# EAGLE board juki_shield (EAGLE 5.11)
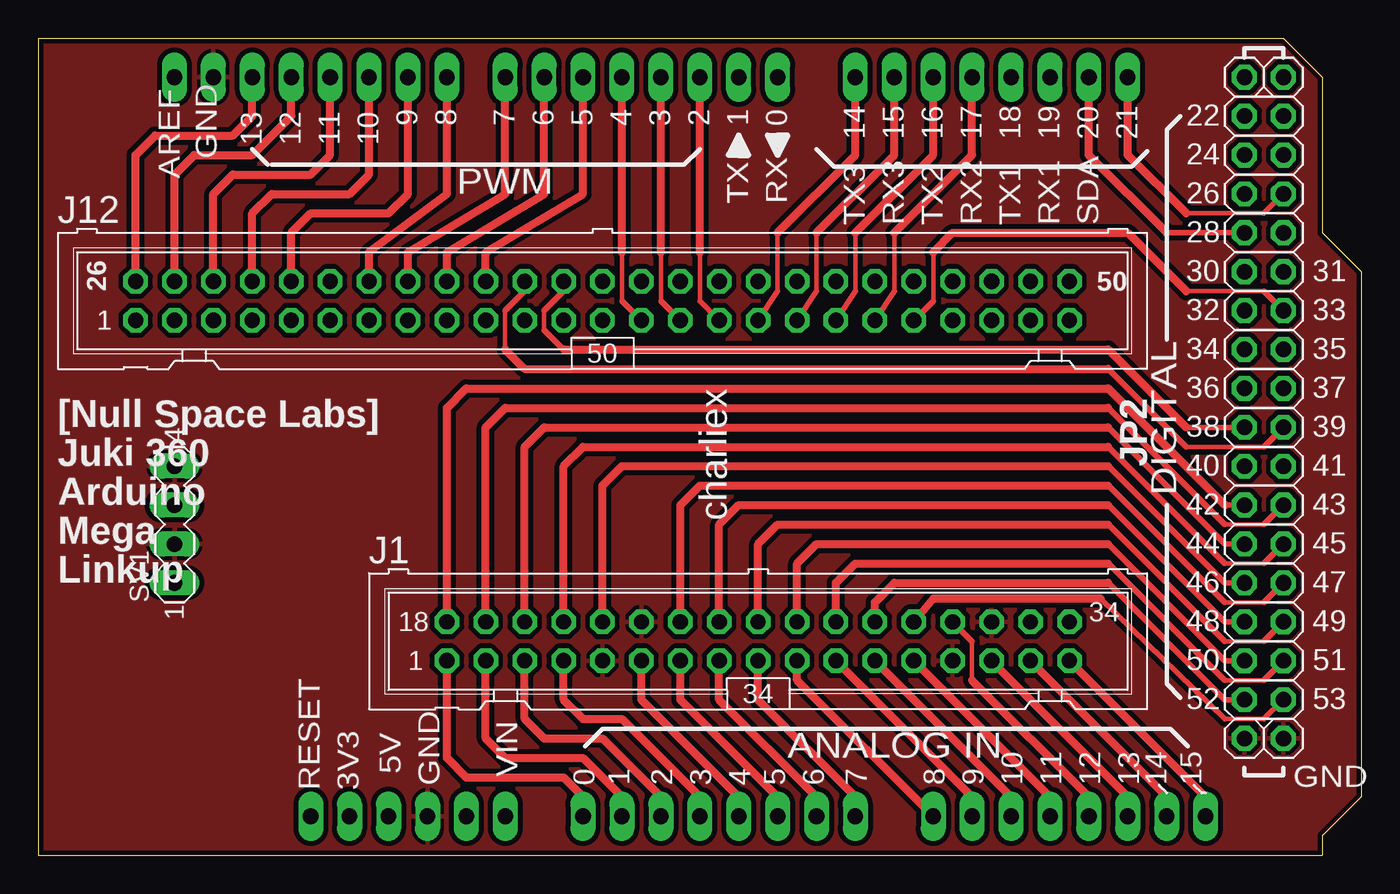
[diagram p0: board, top side]
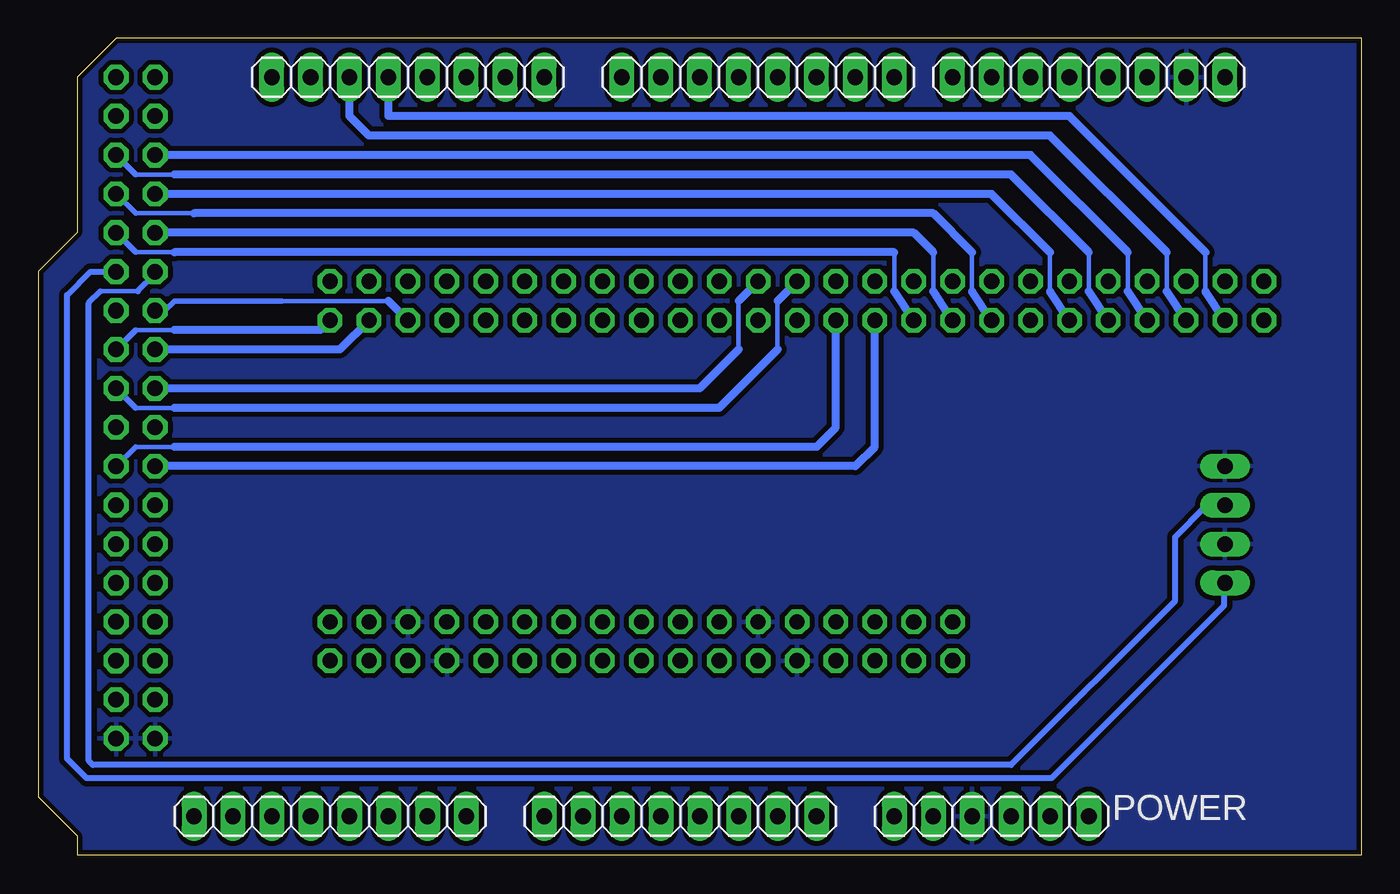
[diagram p1: board, bottom side, seen from below]

Size 86.36 x 53.34 mm. Coordinates in mm from the lower left corner, seen from the top.
Outline: 0,53.34 81.28,53.34 83.82,50.8 83.82,40.64 86.36,38.1 86.36,3.81 83.82,1.27 83.82,0 0,0 0,53.34
Copper layers (1*16): Top 0.0356mm / dielectric 1.5011mm / Bottom 0.0356mm
Design rules "SparkFun-mod": minimum track width 8mil, minimum drill 20mil, track to track 12mil, track to pad 12mil, pad to pad 8mil, via to via 8mil, smd to smd 8mil, copper to edge 12mil, drill to drill 8mil, minimum pad ring 12mil, minimum via ring 10mil, stop-mask expansion 4mil, vias tented up to drill 25mil, thermal gap 10mil
Net classes: 0 default: width 0.356 mm, drill 0.406 mm, clearance 0.203 mm; 1 power: width 0.61 mm, drill 0.711 mm, clearance 0.203 mm; 2 gnd: width 0.305 mm, drill 0.711 mm, clearance 0.203 mm; 3 usbvcc: width 0.508 mm, drill 0.711 mm, clearance 0.203 mm
Milling: 9 lines

## Footprints (pad centres in the part's own frame; a part is rotated, then mirrored left to right if it is on the bottom)
1X08 = drill 1.016 long: 1 -8.89,0; 2 -6.35,0; 3 -3.81,0; 4 -1.27,0; 5 1.27,0; 6 3.81,0; 7 6.35,0; 8 8.89,0
ML34 = drill 0.991 octagon: 1 -20.32,-1.27; 2 -17.78,-1.27; 3 -15.24,-1.27; 4 -12.7,-1.27; 5 -10.16,-1.27; 6 -7.62,-1.27; 7 -5.08,-1.27; 8 -2.54,-1.27; 9 0,-1.27; 10 2.54,-1.27; 11 5.08,-1.27; 12 7.62,-1.27; 13 10.16,-1.27; 14 12.7,-1.27; 15 15.24,-1.27; 16 17.78,-1.27; 17 20.32,-1.27; 18 -20.32,1.27; 19 -17.78,1.27; 20 -15.24,1.27; 21 -12.7,1.27; 22 -10.16,1.27; 23 -7.62,1.27; 24 -5.08,1.27; 25 -2.54,1.27; 26 0,1.27; 27 2.54,1.27; 28 5.08,1.27; 29 7.62,1.27; 30 10.16,1.27; 31 12.7,1.27; 32 15.24,1.27; 33 17.78,1.27; 34 20.32,1.27
ML50 = drill 0.991 octagon: 1 -30.48,-1.27; 2 -27.94,-1.27; 3 -25.4,-1.27; 4 -22.86,-1.27; 5 -20.32,-1.27; 6 -17.78,-1.27; 7 -15.24,-1.27; 8 -12.7,-1.27; 9 -10.16,-1.27; 10 -7.62,-1.27; 11 -5.08,-1.27; 12 -2.54,-1.27; 13 0,-1.27; 14 2.54,-1.27; 15 5.08,-1.27; 16 7.62,-1.27; 17 10.16,-1.27; 18 12.7,-1.27; 19 15.24,-1.27; 20 17.78,-1.27; 21 20.32,-1.27; 22 22.86,-1.27; 23 25.4,-1.27; 24 27.94,-1.27; 25 30.48,-1.27; 26 -30.48,1.27; 27 -27.94,1.27; 28 -25.4,1.27; 29 -22.86,1.27; 30 -20.32,1.27; 31 -17.78,1.27; 32 -15.24,1.27; 33 -12.7,1.27; 34 -10.16,1.27; 35 -7.62,1.27; 36 -5.08,1.27; 37 -2.54,1.27; 38 0,1.27; 39 2.54,1.27; 40 5.08,1.27; 41 7.62,1.27; 42 10.16,1.27; 43 12.7,1.27; 44 15.24,1.27; 45 17.78,1.27; 46 20.32,1.27; 47 22.86,1.27; 48 25.4,1.27; 49 27.94,1.27; 50 30.48,1.27
2X08 = drill 1.016 octagon: 1 -8.89,-1.27; 2 -8.89,1.27; 3 -6.35,-1.27; 4 -6.35,1.27; 5 -3.81,-1.27; 6 -3.81,1.27; 7 -1.27,-1.27; 8 -1.27,1.27; 9 1.27,-1.27; 10 1.27,1.27; 11 3.81,-1.27; 12 3.81,1.27; 13 6.35,-1.27; 14 6.35,1.27; 15 8.89,-1.27; 16 8.89,1.27
1X01 = drill 1.016 octagon: 1 0,0
1X06 = drill 1.016 long: 1 -6.35,0; 2 -3.81,0; 3 -1.27,0; 4 1.27,0; 5 3.81,0; 6 6.35,0
MA04-1 = drill 1.016 long: 1 -3.81,0; 2 -1.27,0; 3 1.27,0; 4 3.81,0

## Placement (x,y rotation side)
ADCH  8-15  [1X08]  67.31,2.54 180 bottom
ADCL  0-7  [1X08]  44.45,2.54 180 bottom
COMMUNICATION  [1X08]  62.23,50.8 0 bottom
J1  [ML34]  46.99,13.97 0 top
J12  [ML50]  36.83,36.2 0 top
JP1  22-37  [2X08]  80.01,39.37 90 top
JP2  38-53  [2X08]  80.01,19.05 90 top
JP3  +5V  [1X01]  78.74,50.8 0 top
JP4  +5V  [1X01]  81.28,50.8 0 top
JP5  GND  [1X01]  78.74,7.62 0 top
JP6  GND  [1X01]  81.28,7.62 0 top
POWER  Reset 3v3 5V GND Vin  [1X06]  24.13,2.54 180 bottom
PWMH  8-13 GND AREF  [1X08]  17.78,50.8 0 bottom
PWML  RX(0) TX(1) 2-7  [1X08]  39.37,50.8 0 bottom
SV1  [MA04-1]  8.89,21.59 90 top

## Library data of the parts
ADCH ADCL COMMUNICATION JP1-JP6 POWER PWMH PWML = pinhead
J1 J12 = con-ml; OC_FARNELL: unknown; OC_NEWARK: unknown
SV1 = con-lstb; OC_FARNELL: unknown; OC_NEWARK: unknown

## Nets
90O: J12.38 JP1.1
+X: J12.14 PWML.5
+Y: J12.16 PWML.3
-X: J12.15 PWML.4
-Y: COMMUNICATION.8 J12.17
ACENT: ADCH.6 J1.15
AREF: PWMH.8
CCWSW: J12.25 JP1.3
CENTERING: J1.18 JP2.12
CVY-M: J1.26 JP2.5
CW/CCW: ADCL.6 J1.7
CWSW: J12.26 PWMH.6
DISPENSEREND: J12.30 PWMH.2
DISPENSERSTART: J1.27 JP2.4
FAST: COMMUNICATION.7 J12.18
GND: J1.5 J1.14 J1.23 J1.32 JP5.1 JP6.1 POWER.4 PWMH.7 SV1.2 SV1.4
HEAD: J1.20 JP2.10
HEADDN: J12.39 JP1.2
LOCATOR: J1.24 JP2.7
M.ORG: J12.28 PWMH.4
MCENT: J12.27 PWMH.5
N$2: JP1.16
N$3: JP1.15
N$33: J1.33
N$34: J1.34
N$51: POWER.1
N$52: POWER.2
N$53: POWER.3
N$55: POWER.5
N$56: POWER.6
N$81: JP3.1
N$82: JP4.1
N$115: J12.1
N$121: J12.7
N$127: J12.13
N$136: J12.22
N$145: J12.31
N$154: J12.40
N$155: J12.41
N$156: J12.42
N$157: J12.43
N$158: J12.44
N$159: J12.45
N$160: J12.46
N$161: J12.47
N$162: J12.48
N$163: J12.49
N$164: J12.50
PCBDETECTOR: J12.36 JP2.15
PCBIN: J12.35 PWML.6
PCBOUT: J12.34 PWML.7
PINUP: J12.33 PWML.8
PULSE: ADCL.5 J1.6
READYIN: J12.32 PWMH.1
READYOUT: ADCL.7 J1.8
ROT: J1.19 JP2.11
ROT_L: JP1.8 SV1.3
ROT_R: JP1.7 SV1.1
RX: PWML.1
SPARE1: ADCL.8 J1.9
SPARE2: ADCH.1 J1.10
SPARE3: ADCH.2 J1.11
SPARE4: ADCH.3 J1.12
SPARE5: ADCH.4 J1.13
SPARE6: ADCH.7 J1.16
SPARE7: J1.30 JP2.1
SPARE8: ADCH.5 J1.31
SPAREA: J12.23 JP1.6
SPAREB: J12.24 JP1.4
SPAREC: J12.29 PWMH.3
SPOT: J1.29 JP2.2
STOPPER: J1.25 JP2.6
SUPPORTER: J1.22 JP2.8
T-HEAD: J12.21 JP1.5
T-VAC: COMMUNICATION.5 J12.20
TACSENSE: J12.37 JP2.16
TAPEKNOCK: ADCH.8 J1.17
TEACH: COMMUNICATION.6 J12.19
TX: PWML.2
VAC: J1.21 JP2.9
VCHANGE: J1.28 JP2.3
XCCW: ADCL.2 J1.2
XCW: ADCL.1 J1.1
XHM: J12.6 JP1.12
XL1: COMMUNICATION.4 J12.2
XL2: COMMUNICATION.3 J12.3
XL3: J12.4 JP1.14
XL4: J12.5 JP1.13
YCCW: ADCL.4 J1.4
YCW: ADCL.3 J1.3
YHM: J12.12 JP2.13
YL1: COMMUNICATION.1 J12.8 JP1.11
YL2: COMMUNICATION.2 J12.9 JP1.10
YL3: J12.10 JP1.9
YL4: J12.11 JP2.14

## Tracks (layer width: path | path; a pad name or v marks a point on that pad's centre or on a via)
90O
  Bottom 0.305: 77.47,29.21 80.01,29.21 | 38.1,33.02 38.1,36.2
  Bottom 0.356: 80.01,29.21 JP1.1
  Bottom 0.508: 77.47,29.21 41.91,29.21 38.1,33.02 | 38.1,36.2 J12.38
+X
  Top 0.305: 38.1,36.2 38.1,39.37
  Top 0.356: J12.14 38.1,36.2
  Top 0.508: 38.1,39.37 PWML.5
+Y
  Top 0.305: 43.18,36.2 43.18,39.37
  Top 0.356: J12.16 43.18,36.2
  Top 0.508: 43.18,39.37 PWML.3
-X
  Top 0.305: 40.64,36.2 40.64,39.37
  Top 0.356: J12.15 40.64,36.2
  Top 0.508: 40.64,39.37 PWML.4
-Y
  Top 0.305: 48.26,36.83 48.26,40.64
  Top 0.356: J12.17 48.26,36.83
  Top 0.508: 48.26,40.64 53.34,45.72 COMMUNICATION.8
ACENT
  Top 0.356: ADCH.6 71.12,3.81
  Top 0.508: 71.12,3.81 J1.15
CCWSW
  Bottom 0.305: 77.47,34.29 80.01,34.29
  Bottom 0.356: 80.01,34.29 JP1.3
  Bottom 0.508: J12.25 67.95,34.29 77.47,34.29
CENTERING
  Top 0.356: 77.47,22.86 JP2.12
  Top 0.508: 77.47,22.86 69.85,30.48 27.94,30.48 26.67,29.21 J1.18
CVY-M
  Top 0.305: 77.47,13.97 80.01,13.97
  Top 0.356: 80.01,13.97 JP2.5 | 69.85,21.59 77.47,13.97
  Top 0.508: J1.26 46.99,20.32 48.26,21.59 69.85,21.59
CW/CCW
  Top 0.356: ADCL.6 48.26,3.81
  Top 0.508: J1.7 41.91,10.16 48.26,3.81
CWSW
  Top 0.508: PWMH.6 13.97,48.26 12.7,46.99 7.62,46.99 6.35,45.72 J12.26
DISPENSEREND
  Top 0.508: J12.30 16.51,40.64 17.78,41.91 22.86,41.91 24.13,43.18 PWMH.2
DISPENSERSTART
  Top 0.356: JP2.4 77.47,12.7 69.85,20.32
  Top 0.508: 69.85,20.32 50.8,20.32 49.53,19.05 J1.27
FAST
  Top 0.305: 50.8,36.83 50.8,40.64
  Top 0.356: J12.18 50.8,36.83
  Top 0.508: 50.8,40.64 55.88,45.72 COMMUNICATION.7
GND
  pour Top (isolate 0.33): 81.28,53.34 0,53.34 0,0 83.82,0 83.82,1.27 86.36,3.81 86.36,38.1 83.82,40.64 83.82,50.8
  pour Bottom (isolate 0.33): 81.28,53.34 0,53.34 0,0 83.82,0 83.82,1.27 86.36,3.81 86.36,38.1 83.82,40.64 83.82,50.8
HEAD
  Top 0.356: 69.85,27.94 77.47,20.32 JP2.10
  Top 0.508: J1.20 31.75,26.67 33.02,27.94 69.85,27.94
HEADDN
  Bottom 0.305: 40.64,36.2 40.64,33.02
  Bottom 0.508: J12.39 40.64,36.2 | 40.64,33.02 43.18,30.48 JP1.2
LOCATOR
  Top 0.305: 77.47,16.51 80.01,16.51
  Top 0.356: 80.01,16.51 JP2.7 | 69.85,24.13 77.47,16.51
  Top 0.508: J1.24 41.91,22.86 43.18,24.13 69.85,24.13
M.ORG
  Top 0.508: J12.28 11.43,43.18 12.7,44.45 17.78,44.45 19.05,45.72 PWMH.4
MCENT
  Top 0.508: PWMH.5 16.51,48.26 13.97,45.72 10.16,45.72 8.89,44.45 J12.27
PCBDETECTOR
  Top 0.305: 30.48,33.02 30.48,35.56 | 74.93,26.67 80.01,26.67
  Top 0.356: J12.36 31.75,36.83 30.48,35.56 | 69.85,31.75 74.93,26.67 | 80.01,26.67 JP2.15
  Top 0.508: 30.48,33.02 31.75,31.75 69.85,31.75
PCBIN
  Top 0.508: PWML.6 35.56,43.18 29.21,39.37 J12.35
PCBOUT
  Top 0.508: PWML.7 33.02,43.18 26.67,39.37 J12.34
PINUP
  Top 0.508: PWML.8 30.48,43.18 24.13,39.37 J12.33
PULSE
  Top 0.356: ADCL.5 45.72,3.81
  Top 0.508: J1.6 39.37,10.16 45.72,3.81
READYIN
  Top 0.508: PWMH.1 26.67,43.18 21.59,39.37 J12.32
READYOUT
  Top 0.356: ADCL.7 50.8,3.81
  Top 0.508: J1.8 44.45,10.16 50.8,3.81
ROT
  Top 0.305: 77.47,21.59 80.01,21.59
  Top 0.356: 69.85,29.21 77.47,21.59 | 80.01,21.59 JP2.11
  Top 0.508: J1.19 29.21,27.94 30.48,29.21 69.85,29.21
ROT_L
  Bottom 0.305: 82.3,36.83 79.86,36.83
  Bottom 0.406: JP1.8 78.74,37.95 79.86,36.83 | 82.3,36.83 83.06,36.07 83.06,6.15 82.8,5.89 22.86,5.89 12.14,16.61 12.14,20.78 10.16,22.76 8.99,22.76 SV1.3
ROT_R
  Bottom 0.406: JP1.7 82.96,38.1 84.48,36.58 84.48,6.3 83.21,5.03 20.22,5.03 8.94,16.31 8.94,17.73 SV1.1
SPARE1
  Top 0.356: ADCL.8 53.34,3.81
  Top 0.508: J1.9 46.99,10.16 53.34,3.81
SPARE2
  Top 0.508: J1.10 49.53,11.43 ADCH.1
SPARE3
  Top 0.356: ADCH.2 60.96,3.81
  Top 0.508: 60.96,3.81 J1.11
SPARE4
  Top 0.356: ADCH.3 63.5,3.81
  Top 0.508: 63.5,3.81 J1.12
SPARE5
  Top 0.356: ADCH.4 66.04,3.81
  Top 0.508: 66.04,3.81 J1.13
SPARE6
  Top 0.356: ADCH.7 73.66,3.81
  Top 0.508: 73.66,3.81 J1.16
SPARE7
  Top 0.305: 77.47,8.89 80.01,8.89
  Top 0.356: 80.01,8.89 JP2.1 | 69.34,16.76 77.47,8.89
  Top 0.508: 69.34,16.76 60.07,16.76 58.42,16.76 J1.30
SPARE8
  Top 0.305: 60.96,11.43 60.96,13.97
  Top 0.356: 60.96,13.97 J1.31 | ADCH.5 68.58,3.81
  Top 0.508: 68.58,3.81 60.96,11.43
SPAREA
  Bottom 0.305: 63.5,36.2 70.48,36.2
  Bottom 0.356: 70.48,36.2 77.47,36.2 78.11,35.56 JP1.6
  Bottom 0.508: J12.23 63.5,36.2
SPAREB
  Bottom 0.508: J12.24 66.68,33.02 JP1.4
SPAREC
  Top 0.508: J12.29 13.97,41.91 15.24,43.18 20.32,43.18 21.59,44.45 PWMH.3
SPOT
  Top 0.356: JP2.2 77.47,10.16 69.85,17.78
  Top 0.508: J1.29 54.61,16.51 55.88,17.78 69.85,17.78
STOPPER
  Top 0.356: JP2.6 77.47,15.24 69.85,22.86
  Top 0.508: J1.25 44.45,21.59 45.72,22.86 69.85,22.86
SUPPORTER
  Top 0.356: 69.85,25.4 77.47,17.78 JP2.8
  Top 0.508: J1.22 36.83,24.13 38.1,25.4 69.85,25.4
T-HEAD
  Top 0.305: 58.42,36.2 58.42,39.37 | 74.93,36.83 80.01,36.83
  Top 0.356: J12.21 58.42,36.2 | 80.01,36.83 JP1.5
  Top 0.508: 58.42,39.37 59.69,40.64 71.12,40.64 74.93,36.83
T-VAC
  Top 0.305: 55.88,36.83 55.88,40.64
  Top 0.356: J12.20 55.88,36.83
  Top 0.508: 55.88,40.64 60.96,45.72 COMMUNICATION.5
TACSENSE
  Top 0.305: 33.02,34.29 33.02,35.56
  Top 0.356: J12.37 34.29,36.83 33.02,35.56 | 74.93,27.94 JP2.16 | 34.29,33.02 33.02,34.29
  Top 0.508: 74.93,27.94 69.85,33.02 34.29,33.02
TAPEKNOCK
  Top 0.356: ADCH.8 76.2,3.81
  Top 0.508: 76.2,3.81 J1.17
TEACH
  Top 0.305: 53.34,36.83 53.34,40.64
  Top 0.356: J12.19 53.34,36.83
  Top 0.508: 53.34,40.64 58.42,45.72 COMMUNICATION.6
VAC
  Top 0.305: 77.47,19.05 80.01,19.05
  Top 0.356: 69.85,26.67 77.47,19.05 | 80.01,19.05 JP2.9
  Top 0.508: J1.21 34.29,25.4 35.56,26.67 69.85,26.67
VCHANGE
  Top 0.305: 77.47,11.43 80.01,11.43
  Top 0.356: 80.01,11.43 JP2.3 | 69.85,19.05 77.47,11.43
  Top 0.508: J1.28 52.07,17.78 53.34,19.05 69.85,19.05
XCCW
  Top 0.356: 38.1,3.81 ADCL.2
  Top 0.508: J1.2 29.21,7.62 30.48,6.35 35.56,6.35 38.1,3.81
XCW
  Top 0.356: 35.56,3.81 ADCL.1
  Top 0.508: J1.1 26.67,6.35 27.94,5.08 34.29,5.08 35.56,3.81
XHM
  Bottom 0.305: 20.32,36.83 20.32,39.37
  Bottom 0.508: J12.6 20.32,36.83 | 20.32,39.37 24.13,43.18 JP1.12
XL1
  Bottom 0.305: 10.16,36.83 10.16,39.37
  Bottom 0.508: J12.2 10.16,36.83 | 10.16,39.37 19.05,48.26 63.5,48.26 COMMUNICATION.4
XL2
  Bottom 0.305: 12.7,36.83 12.7,39.37
  Bottom 0.508: J12.3 12.7,36.83 | 12.7,39.37 20.32,46.99 64.77,46.99 66.04,48.26 COMMUNICATION.3
XL3
  Bottom 0.305: 15.24,36.83 15.24,39.37
  Bottom 0.508: J12.4 15.24,36.83 | 15.24,39.37 21.59,45.72 JP1.14
XL4
  Bottom 0.305: 17.78,36.83 17.78,39.37 | 77.47,44.45 80.01,44.45
  Bottom 0.356: 80.01,44.45 JP1.13
  Bottom 0.508: J12.5 17.78,36.83 | 17.78,39.37 22.86,44.45 77.47,44.45
YCCW
  Top 0.356: 43.18,3.81 ADCL.4
  Top 0.508: J1.4 34.29,10.16 35.56,8.89 38.1,8.89 43.18,3.81
YCW
  Top 0.356: 40.64,3.81 ADCL.3
  Top 0.508: J1.3 31.75,8.89 33.02,7.62 36.83,7.62 40.64,3.81
YHM
  Bottom 0.305: 77.47,26.67 80.01,26.67
  Bottom 0.356: 80.01,26.67 JP2.13
  Bottom 0.508: J12.12 34.29,27.94 35.56,26.67 77.47,26.67
YL1
  Top 0.305: 80.01,41.91 74.93,41.91
  Top 0.356: JP1.11 80.01,41.91
  Top 0.508: COMMUNICATION.1 71.12,45.72 74.93,41.91
  Bottom 0.305: 25.4,36.83 25.4,39.37 | 76.2,41.91 80.01,41.91
  Bottom 0.356: 80.01,41.91 JP1.11
  Bottom 0.508: J12.8 25.4,36.83 | 25.4,39.37 27.94,41.91 76.2,41.91
YL2
  Top 0.356: JP1.10 73.66,40.64
  Top 0.508: COMMUNICATION.2 68.58,45.72 73.66,40.64
  Bottom 0.305: 27.94,36.83 27.94,39.37
  Bottom 0.508: J12.9 27.94,36.83 | 27.94,39.37 29.21,40.64 JP1.10
YL3
  Bottom 0.305: 30.48,36.83 30.48,39.37 | 77.47,39.37 80.01,39.37
  Bottom 0.356: 80.01,39.37 JP1.9
  Bottom 0.508: J12.10 30.48,36.83 | 30.48,39.37 77.47,39.37
YL4
  Bottom 0.508: J12.11 31.75,26.67 33.02,25.4 JP2.14

## Text on the board
tPlace: 9 | 8 | 7 | 6 | 5 | 4 | 3 | 2 | 1 | 0 | 22 | 14 | 15 | 16 | 17 | 18 | 19 | 20 | 21 | 13 | 12 | 11 | 10 | 24 | 26 | 28 | 30 | 31 | 32 | 33 | 34 | 35 | 36 | 37 | 38 | 39 | 40 | 41 | 42 | 43 | 44 | 45 | 46 | 47 | 48 | 49 | 50 | 51 | 52 | 53 | 0 | 1 | 2 | 3 | 4 | 5 | 6 | 7 | 8 | 9 | 10 | 11 | 12 | 13 | 14 | 15
tNames: GND | AREF | PWM | TX | RX | TX3 | RX3 | TX2 | RX2 | TX1 | RX1 | SDA | 50 | 26 | charliex | [Null Space Labs] | Juki 360 | JP2 | Arduino | DIGITAL | Mega | Linkup | ANALOG IN | 5V | GND | VIN | RESET | 3V3 | GND